# Altium PCB RMC Backplane PCB.PcbDoc
Units mm, origin at the board's own origin, x right, y up, seen from the top; angles counter-clockwise.
Board outline 152.33 x 103.42 mm, 2 copper layers (Top Layer, Bottom Layer); 44 components, 61 nets, 266 pads, 39 vias.
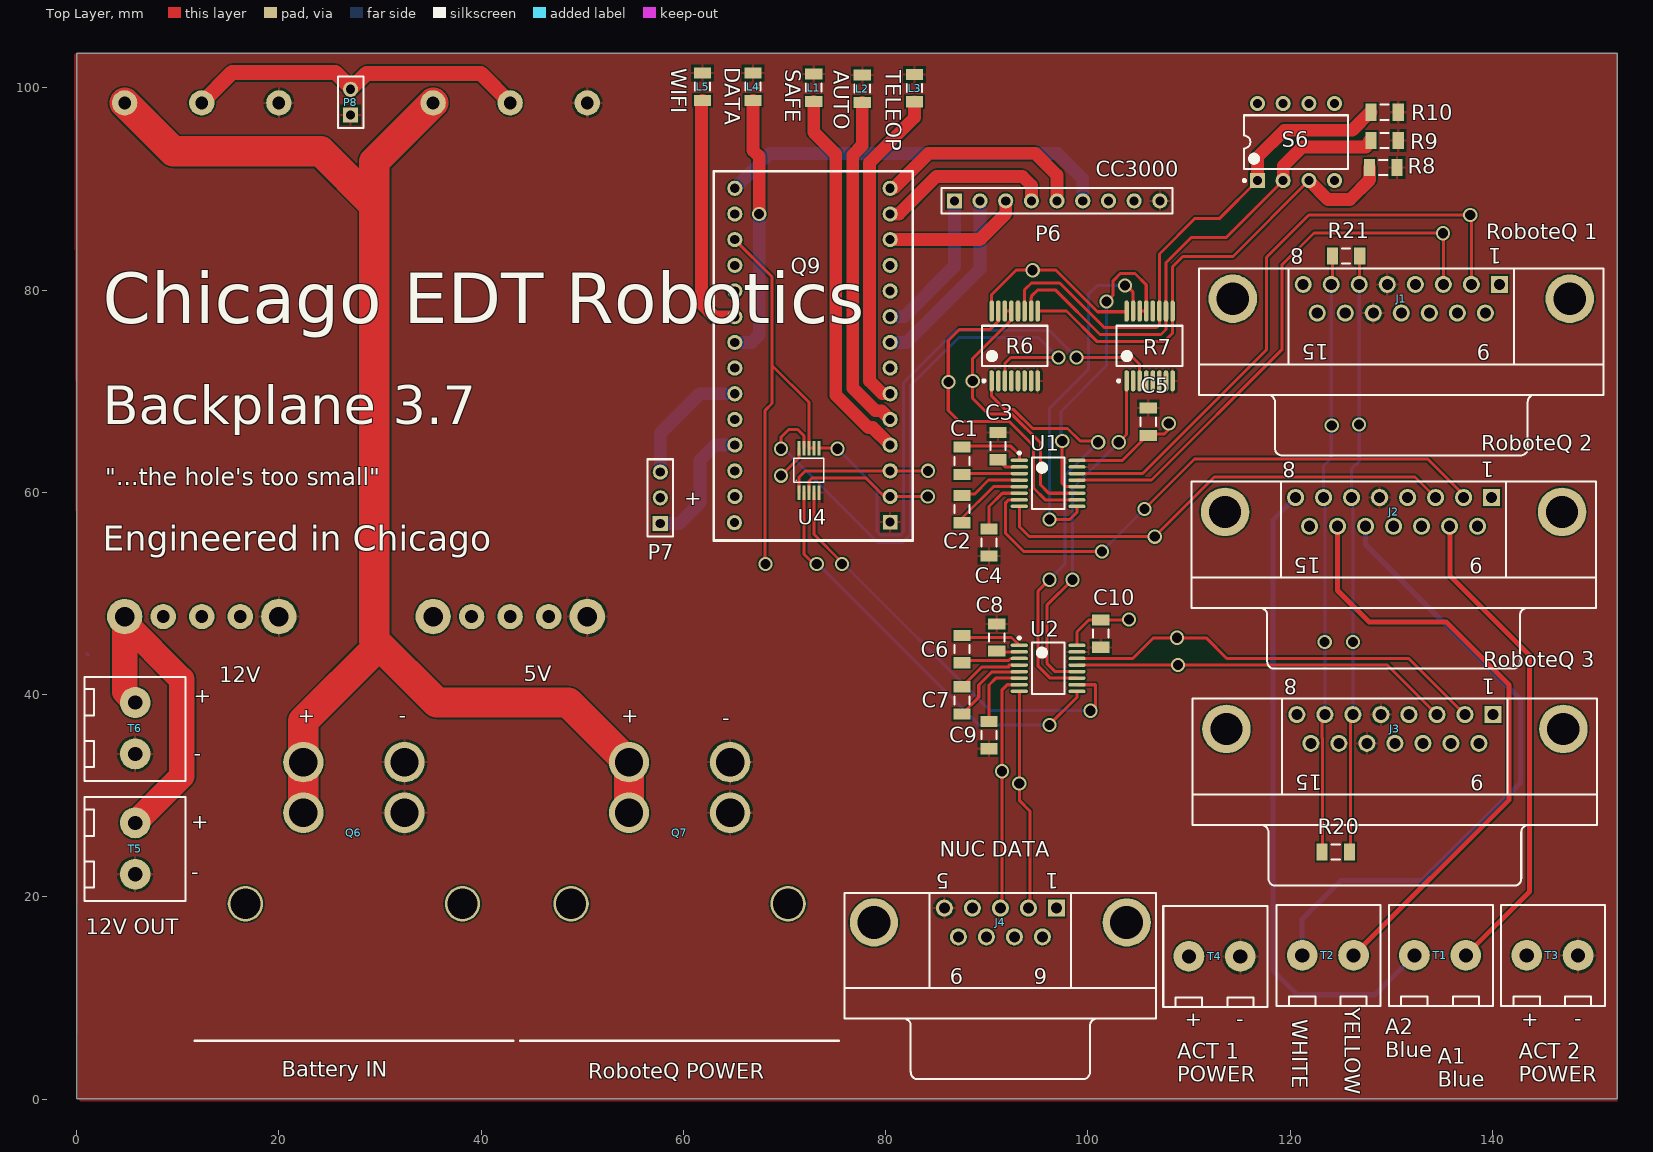
[diagram p0: Top Layer view]
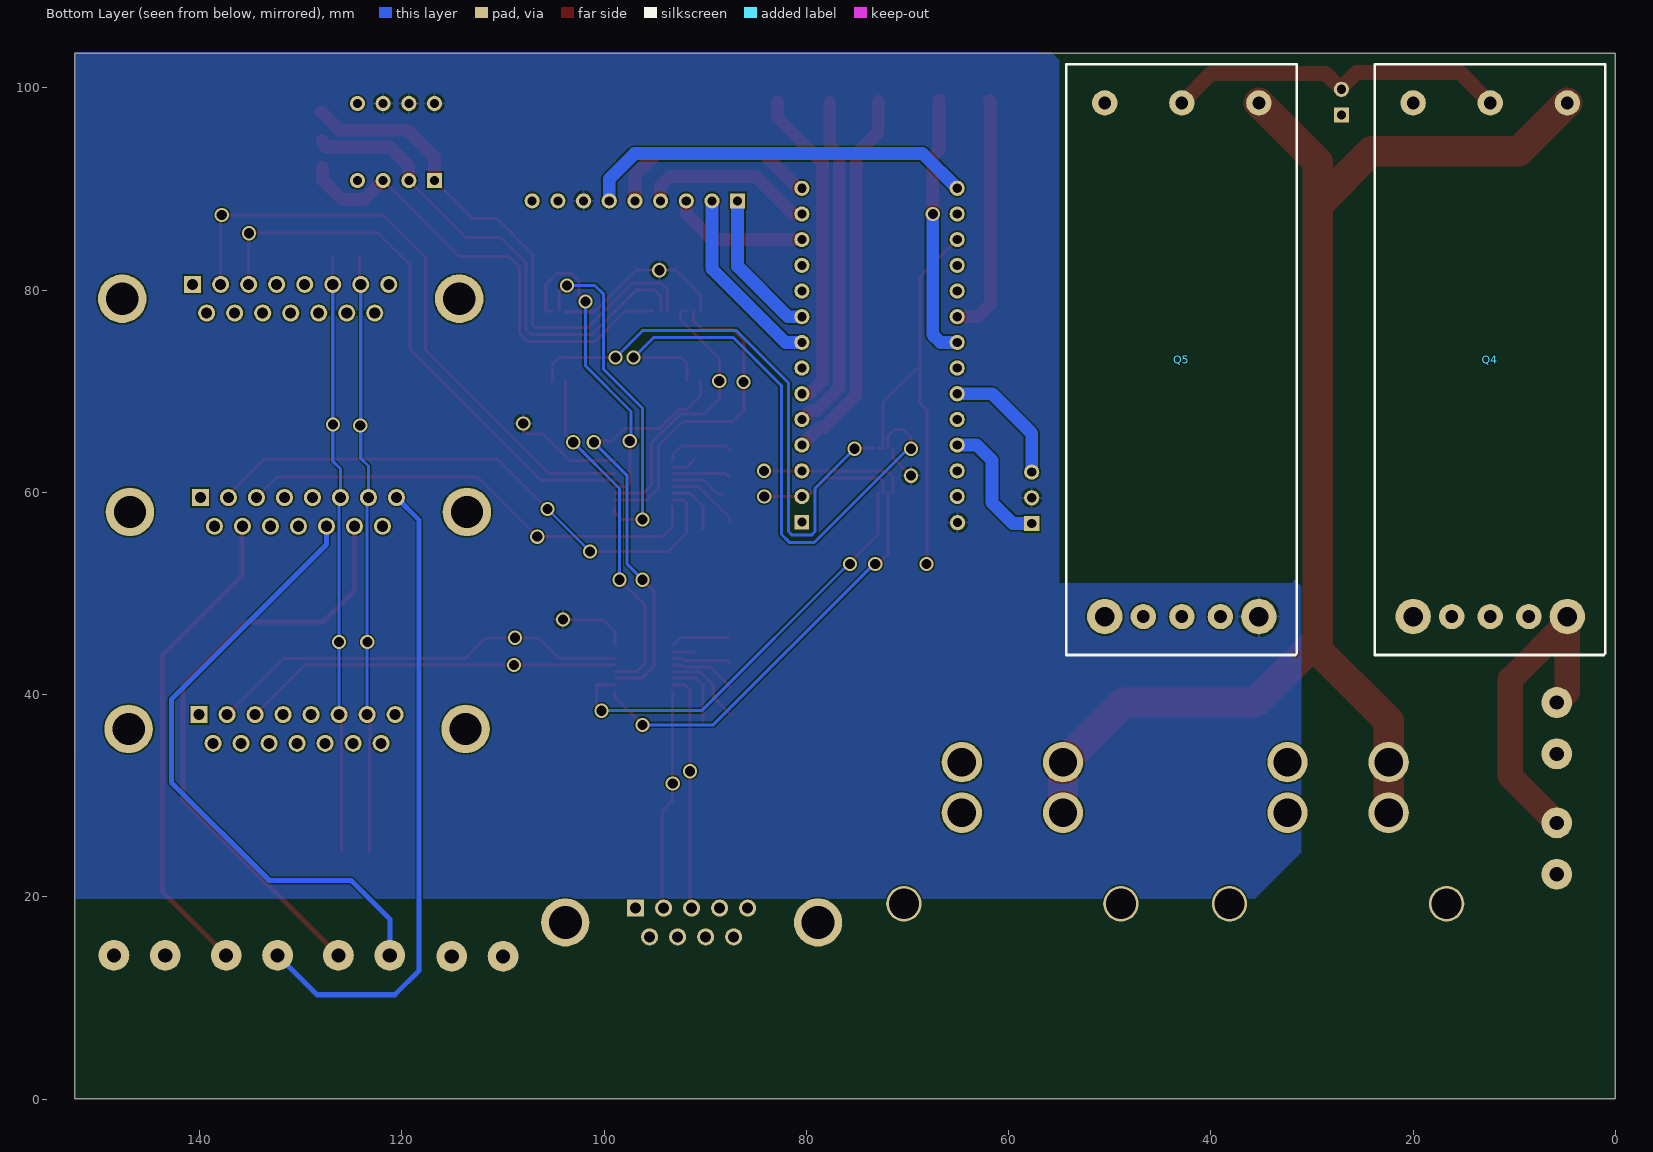
[diagram p1: Bottom Layer view, seen from below]

## Layer stack, top to bottom
Top Solder: solder mask 0.0102, Solder Resist, Dk 3.5
Top Layer: signal copper 0.0356
Dielectric 1: dielectric 0.32, FR-4, Dk 4.8
Bottom Layer: signal copper 0.0356
Bottom Solder: solder mask 0.0102, Solder Resist, Dk 3.5

## Board outline
0,0.025 152.333,0.025 152.333,103.44 0,103.44

## Design rules (kind name [scope] priority, off if disabled: settings)
Clearance [All] p1: gap=0.15
PolygonConnect [All] p1: connectstyle=Relief reliefconductorwidth=0.254 reliefentries=4 polygonreliefangle="90 Angle" airgapwidth=0.254
RoutingVias [All] p1: holewidth=0.711 width=1.27 viastyle="Through Hole" minholewidth=0.711 minwidth=1.27 maxholewidth=0.711 maxwidth=1.27
SolderMaskExpansion [All] p1: expansion=0.102
Width [All] p1: maxlimit=10 minlimit=0.254 preferedwidth=0.254
30 further rules are at their usual default settings.

## Components (designator, comment, footprint, x,y, rotation, side; value= is the part's Value field where it differs from the comment)
C1 "Cap Semi" C1206 87.563,63.125 r270 top
C2 "Cap Semi" C1206 87.563,58.355 r270 top
C3 "Cap Semi" C1206 91.119,64.578 r270 top
C4 "Cap Semi" C1206 90.23,55.053 r270 top
C5 "Cap Semi" C1206 105.978,66.991 r90 top
C6 "Cap Semi" C1206 87.563,44.512 r270 top
C7 "Cap Semi" C1206 87.563,39.432 r270 top
C8 "Cap Semi" C1206 90.992,45.655 r270 top
C9 "Cap Semi" C1206 90.23,36.003 r270 top
C10 "Cap Semi" C1206 101.279,46.036 r270 top
J1 "D Connector 15" DSUB1.385-2H15 130.997,69.658 r180 top
J2 "D Connector 15" DSUB1.385-2H15 130.235,48.576 r180 top
J3 "D Connector 15" DSUB1.385-2H15 130.362,27.113 r180 top
J4 "D Connector 9" DSUB1.385-2H9 91.35,7.975 r180 top
L1 "Cap Semi" C1206 72.9,100.025 r270 top
L2 "Cap Semi" C1206 77.7,99.925 r270 top
L3 "Cap Semi" C1206 82.87,99.984 r270 top
L4 "Cap Semi" C1206 66.9,100.125 r270 top
L5 "Cap Semi" C1206 61.9,100.125 r270 top
P6 "Header 9" HDR1X9 86.801,88.835 r0 top
P7 "Header 3" HDR1X3 57.724,56.931 r90 top
P8 "Header 2" HDR1X2 27.1,97.325 r90 top
Q4 "DC/DC" EHHD 23.8,98.525 r270 bottom
Q5 "DC/DC" EHHD 54.3,98.525 r270 bottom
Q6 "Power Conn" "Mini-Fit Power Conn" 16.7,19.325 r0 top
Q7 "Power Conn" "Mini-Fit Power Conn" 48.9,19.325 r0 top
Q9 "TeensyLC" TeensyLC 80.457,57.058 r180 top
R6 "Res Pack4" SSOP16_N 92.77,74.484 r90 top
R7 "Res Pack4" SSOP16_N 106.105,74.484 r90 top
R8 "Cap Semi" C1206 129.219,92.137 r180 top
R9 "Cap Semi" C1206 129.346,94.804 r180 top
R10 "Cap Semi" C1206 129.346,97.598 r0 top
R20 "Cap Semi" C1206 124.52,24.446 r0 top
R21 "Cap Semi" C1206 125.536,83.374 r0 top
S6 "SW-DIP4" DIP-8 120.589,94.65 r90 top
T1 "282857-2" 282857-2 132.3,14.225 r270 top
T2 "282857-2" 282857-2 121.2,14.225 r270 top
T3 "282857-2" 282857-2 143.4,14.225 r270 top
T4 "282857-2" 282857-2 110,14.125 r270 top
T5 "282857-2" 282857-2 5.8,27.325 r180 top
T6 "282857-2" 282857-2 5.8,39.225 r180 top
U1 "MAX202IPW" TI-PW16_N 96.072,60.895 r0 top
U2 "MAX202IPW" TI-PW16_N 96.072,42.607 r0 top
U4 "Mux/Demux" TS3A24157 71.44,59.979 r90 top

## Footprints (in the part's own frame and the unit in brackets; to place one, negate y for a bottom-side part, rotate by r counter-clockwise, add the part's x,y. Pads: shape width x height; smd on the part's side, far side on the other; paste and mask are expansions set on the pad)
282857-2 [mil] "TE CONNECTIVITY / BUCHANAN  282857-2  Wire-To-Board Terminal Block, 2, 300 V, 24 A, 30 AWG, 12 AWG, 3 mm²"
  round 120 hole 55: 1(0,0) 2(0,200)
  silkscreen extent -196,-100 198,305, body extent -196,-100 198,320, height 752
C1206 [mm] "Chip Capacitor, Body 3.2x1.6mm, IPC High Density"
  rect 1.1x1.7 smd: 1(-1.35,0) 2(1.35,0)
  silkscreen extent -0.4,-0.75 0.4,0.75, body extent -1.7,-0.9 1.7,0.9, height 1.3
DIP-8 [mm] "DIP; 8 Leads; Row Spacing 7.62 mm; Pitch 2.54 mm"
  rect 1.5x1.5 hole 0.9: 1(-3.81,3.81)
  round 1.5 hole 0.9: 2(-3.81,1.27) 3(-3.81,-1.27) 4(-3.81,-3.81) 5(3.81,-3.81) 6(3.81,-1.27) 7(3.81,1.27) 8(3.81,3.81)
  silkscreen extent -3.93,-5.15 2.65,5.23, body extent -3.6,-5.15 3.6,5.15, height 5.08
DSUB1.385-2H9 [mm] "Connector; D Subminiature; 9 Position; Right Angle; Pitch 1.385 mm"
  rect 1.69x1.69 hole 1.09: 1(-5.54,-10.92)
  round 1.69 hole 1.09: 2(-2.77,-10.92) 3(0,-10.92) 4(2.77,-10.92) 5(5.54,-10.92) 6(-4.155,-8.08) 7(-1.385,-8.08) 8(1.385,-8.08) 9(4.155,-8.08)
  round 4.76 hole 3.26: 10(-12.495,-9.5) 11(12.495,-9.5)
  silkscreen extent -15.4,-12.4 15.4,6
DSUB1.385-2H15 [mm] "Connector; D Subminiature; 15 Position; Right Angle; Pitch 1.385 mm"
  rect 1.69x1.69 hole 1.09: 1(-9.695,-10.92)
  round 1.69 hole 1.09: 2(-6.925,-10.92) 3(-4.155,-10.92) 4(-1.385,-10.92) 5(1.385,-10.92) 6(4.155,-10.92) 7(6.925,-10.92) 8(9.695,-10.92) 9(-8.31,-8.08) 10(-5.54,-8.08) 11(-2.77,-8.08) 12(0,-8.08) 13(2.77,-8.08) 14(5.54,-8.08) 15(8.31,-8.08)
  round 4.8 hole 3.18: 16(-16.66,-9.5) 17(16.66,-9.5)
  silkscreen extent -20,-12.5 20,6
EHHD [mm] "DC/DC"
  round 2.5 hole 1.27: 1(0,19.04) 2(0,11.42) 3(0,3.8) 5(50.8,7.61) 6(50.8,11.42) 7(50.8,15.23)
  round 3.5 hole 1.93: 4(50.8,3.8) 8(50.8,19.04)
  Top Layer lines w0.254: 54.44,22.8 54.6,22.64
  silkscreen extent -3.8,0 54.6,22.8
HDR1X2 [mm] "Connector; Header; 2 Position"
  rect 1.5x1.5 hole 0.9: 1(0,0)
  round 1.5 hole 0.9: 2(2.54,0)
  silkscreen extent -1.27,-1.27 3.81,1.27
HDR1X3 [mm] "Connector; Header; 3 Position"
  rect 1.5x1.5 hole 0.9: 1(0,0)
  round 1.5 hole 0.9: 2(2.54,0) 3(5.08,0)
  silkscreen extent -1.27,-1.27 6.35,1.27
HDR1X9 [mm] "Connector; Header; 9 Position"
  rect 1.5x1.5 hole 0.9: 1(0,0)
  round 1.5 hole 0.9: 2(2.54,0) 3(5.08,0) 4(7.62,0) 5(10.16,0) 6(12.7,0) 7(15.24,0) 8(17.78,0) 9(20.32,0)
  silkscreen extent -1.27,-1.27 21.59,1.27
"Mini-Fit Power Conn" [mm] "Molex Mini-Fit Power Connector"
  round 3.5 hole 3: 0(0,0) 0(21.46,0)
  round 4 hole 2.8: 1(5.73,9) 1(5.73,14) 2(15.73,9) 2(15.73,14)
  silkscreen extent -5,-13.56 26.46,-13.56
SSOP16_N [mm] "SOP, 16-Leads, Body 6.2x5.3mm, Pitch 0.65mm, IPC Medium Density"
  oval 2.1x0.45 smd: 1(-3.45,2.275) 2(-3.45,1.625) 3(-3.45,0.975) 4(-3.45,0.325) 5(-3.45,-0.325) 6(-3.45,-0.975) 7(-3.45,-1.625) 8(-3.45,-2.275) 9(3.45,-2.275) 10(3.45,-1.625) 11(3.45,-0.975) 12(3.45,-0.325) 13(3.45,0.325) 14(3.45,0.975) 15(3.45,1.625) 16(3.45,2.275)
  silkscreen extent -3.57,-3.25 2,3.25, body extent -2.7,-3.25 2.7,3.25, height 2
TeensyLC [mm] "Teensy LC Footprint"
  rect 1.45x1.45 hole 0.9: 1(0,0)
  round 1.5 hole 0.9: 2(0,-2.54) 3(0,-5.08) 4(0,-7.62) 5(0,-10.16) 6(0,-12.7) 7(0,-15.24) 8(0,-17.78) 9(0,-20.32) 10(0,-22.86) 11(0,-25.4) 12(0,-27.94) 13(0,-30.48) 14(0,-33.02) 15(15.367,-33.02) 16(15.367,-30.48) 17(15.367,-27.94) 18(15.367,-25.4) 19(15.367,-22.86) 20(15.367,-20.32) 21(15.367,-17.78) 22(15.367,-15.24) 23(15.367,-12.7) 24(15.367,-10.16) 25(15.367,-7.62) 26(15.367,-5.08) 27(15.367,-2.54) 28(15.41,0.05)
  silkscreen extent -2.24,-34.7 17.43,1.82
TI-PW16_N [mm] "TSOP, 16-Leads, Body 5x4.4mm, Pitch 0.65mm, IPC Medium Density"
  oval 1.7x0.35 smd: 1(-2.85,2.275) 2(-2.85,1.625) 3(-2.85,0.975) 4(-2.85,0.325) 5(-2.85,-0.325) 6(-2.85,-0.975) 7(-2.85,-1.625) 8(-2.85,-2.275) 9(2.85,-2.275) 10(2.85,-1.625) 11(2.85,-0.975) 12(2.85,-0.325) 13(2.85,0.325) 14(2.85,0.975) 15(2.85,1.625) 16(2.85,2.275)
  silkscreen extent -2.97,-2.55 1.6,3.12, body extent -2.25,-2.55 2.25,2.55, height 1.2
TS3A24157 [mm] "TS3A24157 Mux/Demux SMD"
  rect 1.45x0.3 smd: 1(0,0) 2(0,-0.5) 3(0,-1) 4(0,-1.5) 5(0,-2) 6(4.4,-2) 7(4.4,-1.5) 8(4.4,-1) 9(4.4,-0.5) 10(4.4,0)
  silkscreen extent 1.03,-2.44 3.39,0.53

## Part data
C1 C2 C3 C4 C5 C6 C7 C8 C9 C10 L1 L2 L3 L4 L5 R8 R9 R10 R20 R21: "Capacitor (Semiconductor SIM Model)"
J1 J2 J3: "Receptacle Assembly, 15 Position, Right Angle"
J4: "Receptacle Assembly, 9 Position, Right Angle"
P6: "Header, 9-Pin"
P7: "Header, 3-Pin"
P8: "Header, 2-Pin"
Q4 Q5: library part EHHD, "Voltage Regulator"
Q6 Q7: library part "Mini-Fit Power Conn", "Mini-Fit Molex Connector"
R6 R7: "Isolated Resistor Network"
S6: "DIP Switch"
U1 U2: "5-V Dual RS-232 Line Driver / Receiver with ±15-kV ESD Protection, -40 to 85 degC, 16-Pin TSSOP (PW), Green (RoHS & no Sb/Br)"

## Via types
v1: diameter 1.4, hole 1, Top Layer to Bottom Layer, 39 vias

## Nets (pads, with @x,y where several pads share a name; then routed paths per layer and width w, separated by ;. In a path a pad name is that pad's centre, name@x,y a point inside that pad or via, vN(x,y) a via of type N, cw(c..) or ccw(c..) an arc to the next point about the centre after c; other vN are vias at no path point)
3V3: P6.8
CAN-H: J1.7 J2.7 J3.7 R20.1 R21.1 | length 59.5
  Top Layer w0.3: R20.1 123.197,24.473 123.197,35.694 123.17,35.721 123.17,37.766 J3.7 ; J1.7 124.186,80.692 R21.1
  Bottom Layer w0.3: J3.7 123.437,59.369 J2.7 123.31,62.606 124.072,63.368 J1.7
  other v1: 123.422,45.225 124.122,66.625
CAN-L: J1.6 J2.6 J3.6 R20.2 R21.2 | length 59.5
  Top Layer w0.3: R20.2 125.967,24.543 125.967,37.793 J3.6 ; J1.6 126.886,80.622 R21.2
  Bottom Layer w0.3: J3.6 126.207,59.369 J2.6 126.08,62.328 126.842,63.09 J1.6
  other v1: 126.222,45.225 126.822,66.725
CLK: P6.6 Q9.15 | length 39
  Bottom Layer w1.27: Q9.15 68.519,93.507 96.988,93.507 99.501,90.994 P6.6
"CONTROL LINE": Q9.17 U4.7 U4.8 | length 44.3
  Top Layer w0.3: Q9.17 68.773,81.315 68.773,72.552 ; v1@68.1,52.725 68.1,68.125 68.773,68.798 68.773,72.552 ; U4.7 U4.8 72.44,68.885 68.773,72.552
  other v1: 68.122,52.925
CS: P6.3 Q9.12 | length 13.8
  Top Layer w1.27: Q9.12 89.314,84.998 91.881,87.565 P6.3
GROUND: C3.1 C4.2 C5.2 C8.1 C9.2 C10.2 J1.5 J1.13 J2.5 J3.5 J3.13 J4.5 L1.1 L2.1 L3.1 L4.1 L5.1 P6.9 P8.1 Q4.3 Q4.4 Q5.3 Q5.4 Q6.2 Q7.2 Q9.1 R6.8 R7.8 R8.1 R9.1 R10.2 T3.2 T4.2 T5.2 T6.2 U1.15 U2.15 U4.5
IRQ: P6.1 Q9.9 | length 14.9
  Bottom Layer w1.27: Q9.9 81.821,77.378 86.801,82.358 P6.1
"LED AUTO": L2.2 Q9.5 | length 33.6
  Top Layer w1.27: L2.2 77.7,94.325 76.749,93.374 76.749,70.334 79.001,68.082 79.593,68.082 Q9.5
"LED DATA": L4.2 Q9.21 | length 26.2
  Top Layer w1.27: L4.2 66.9,93.825 67.503,93.222 v1(67.503,87.538)
  Bottom Layer w1.27: Q9.21 66.741,74.838 67.503,75.6 v1(67.503,87.538)
"LED SAFE": L1.2 Q9.4 | length 37.4
  Top Layer w1.27: L1.2 72.9,95.625 75.072,93.453 75.072,69.639 78.306,66.405 78.73,66.405 Q9.4
"LED TELEOP": L3.2 Q9.6 | length 32
  Top Layer w1.27: Q9.6 79.695,69.758 78.425,71.028 78.425,92.618 82.87,97.063 L3.2
"LED WIFI": L5.2 Q9.20 | length 24
  Top Layer w1.27: L5.2 61.788,98.663 61.788,78.648 63.058,77.378 Q9.20
MISO: P6.5 Q9.14 | length 21.4
  Top Layer w1.27: Q9.14 80.805,90.078 84.261,93.534 94.802,93.534 96.961,91.375 P6.5
MOSI: P6.4 Q9.13 | length 17.4
  Top Layer w1.27: Q9.13 81.313,87.538 85.023,91.248 93.532,91.248 94.421,90.359 P6.4
NetC1_1: C1.1 U1.1 | length 6.8
  Top Layer w0.3: C1.1@87.563,64.15 87.991,64.578 92.389,64.578 93.222,63.745 U1.1
NetC1_2: C1.2 U1.3 | length 5.8
  Top Layer w0.3: C1.2@87.563,61.45 87.983,61.87 U1.3
NetC2_1: C2.1 U1.4 | length 5.5
  Top Layer w0.3: C2.1@88.325,59.832 88.786,59.832 90.174,61.22 U1.4
NetC2_2: C2.2 U1.5 | length 7.4
  Top Layer w0.3: C2.2 87.563,57.466 90.667,60.57 U1.5
NetC3_2: C3.2 U1.2 | length 2.4
  Top Layer w0.3: C3.2 91.827,62.52 U1.2
NetC4_1: C4.1 U1.6 | length 5.7
  Top Layer w0.3: C4.1 90.23,58.609 91.541,59.92 U1.6
NetC6_1: C6.1 U2.1 | length 5.9
  Top Layer w0.3: C6.1@87.69,45.655 92.449,45.655 U2.1
NetC6_2: C6.2 U2.3 | length 5.8
  Top Layer w0.3: C6.2 87.783,43.382 92.148,43.382 92.348,43.582 U2.3
NetC7_1: C7.1 U2.4 | length 6.7
  Top Layer w0.3: C7.1 89.522,42.741 92.2,42.741 92.2,42.932 U2.4
NetC7_2: C7.2 U2.5 | length 8.1
  Top Layer w0.3: C7.2 89.214,39.733 89.214,40.956 90.52,42.262 93.222,42.262 U2.5
NetC8_2: C8.2 U2.2 | length 2.3
  Top Layer w0.3: C8.2 91.065,44.232 U2.2
NetC9_1: C9.1 U2.6 | length 6.9
  Top Layer w0.3: C9.1 90.23,40.956 90.906,41.632 U2.6
NetJ2_8: J2.8 T1.1 | length 64.3
  Bottom Layer w0.5: J2.8 118.3,57.256 118.3,12.725 120.7,10.325 128.4,10.325 T1.1
NetJ2_10: J2.10 T1.2 | length 48.3
  Top Layer w0.5: J2.10 135.823,56.608 135.823,51.751 143.697,43.877 143.697,20.542 T1.2
NetJ2_13: J2.13 T2.1 | length 62.5
  Bottom Layer w0.5: T2.1 121.2,17.825 125,21.625 133.1,21.625 142.8,31.325 142.8,39.525 127.465,54.86 J2.13
NetJ2_14: J2.14 T2.2 | length 60.3
  Top Layer w0.5: J2.14 124.695,50.306 127.822,47.179 135.442,47.179 141.665,40.956 141.665,29.61 T2.2
NetJ4_2: J4.2 U2.8 | length 21.9
  Top Layer w0.254: J4.2 J4.2@94.27,19.045
  Top Layer w0.3: U2.8 93.222,29.556 94.27,28.508 J4.2@94.27,19.045
  other v1: 93.222,31.225
NetJ4_3: J4.3 U2.7 | length 23.6
  Top Layer w0.254: J4.3 J4.3@91.5,19.045
  Top Layer w0.3: J4.3@91.5,19.045 91.5,28.508 91.5,40.448 92.034,40.982 U2.7
  other v1: 91.522,32.425
NetP7_1: P7.1 Q9.25 | length 13.2
  Top Layer w1.27: P7.1 P7.1@57.851,57.058
  Bottom Layer w1.27: P7.1 59.596,56.931 61.655,58.99 61.655,63.181 63.152,64.678 Q9.25
NetP7_3: P7.3 Q9.23 | length 12.8
  Bottom Layer w1.27: P7.3 57.724,65.854 61.628,69.758 Q9.23
NetP8_2: P8.2 Q4.2 Q5.2 | length 34.4
  Top Layer w1.5: Q4.2 15.38,101.525 25.6,101.525 27.1,100.025 P8.2 28.66,101.425 39.98,101.425 Q5.2
NetQ4_1: Q4.1 Q5.1 Q6.1 Q7.1 | length 139.3
  Top Layer w3: Q4.1 9.56,93.725 24.14,93.725 29.44,88.425 ; Q6.1@22.43,28.325 22.43,33.325 22.43,37.395 29.93,44.895 ; Q5.1 29.44,92.705 29.44,88.425 ; Q7.1@54.63,28.225 54.63,33.225 48.63,39.225 35.6,39.225 29.44,45.385 29.44,88.425
NetQ4_8: Q4.8 T5.1 T6.1 | length 33
  Top Layer w2.5: Q4.8 Q4.8@4.76,47.165 ; T5.1 10.4,31.925 10.4,41.525 Q4.8@4.76,47.165 ; T6.1 4.76,40.265 Q4.8@4.76,47.165
NetR6_1: R6.1 U2.11 | length 43
  Top Layer w0.3: R6.1 90.495,69.52 91.824,68.191 92.678,68.191 94.544,66.325 98,66.325 99.239,65.086 101.025,65.086 v1(101.025,64.959) ; v1(96.199,51.37) 95.056,50.227 95.056,42.861 96.285,41.632 U2.11
  Bottom Layer w0.3: v1(96.199,51.37) 97.723,52.894 97.723,61.657 v1(101.025,64.959)
NetR6_3: R6.3 U4.9 | length 61.6
  Top Layer w0.3: v1(69.656,64.324) 69.656,65.467 70.418,66.229 71.307,66.229 71.94,65.596 U4.9 ; R6.3 91.795,72.747 92.389,73.341 v1(97.088,73.341)
  Bottom Layer w0.3: v1(69.656,64.324) 69.955,64.324 79.209,55.07 81.705,55.07 82.47,55.835 82.47,70.551 87.221,75.302 95.127,75.302 v1(97.088,73.341)
NetR6_9: R6.9 R7.9 R8.2 S6.3 | length 47.2
  Top Layer w0.3: R6.9@95.176,77.934 97.902,77.934 100.921,74.915 107.552,74.915 108.38,75.743 R7.9 108.38,82.314 109.396,83.33 114.349,83.33 S6.3
  Top Layer w1.27: S6.3 123.737,88.962 125.917,88.962 127.869,90.914 R8.2
NetR6_10: R6.10 R7.10 R9.2 S6.2 | length 49.8
  Top Layer w0.3: R6.10 94.395,79.214 94.451,79.27 94.451,79.437 95.015,80.001 96.834,80.001 101.213,75.621 107.242,75.621 107.73,76.109 R7.10 107.73,82.713 110.237,85.22 113.699,85.22 S6.2
  Top Layer w1.27: S6.2 119.319,92.27 121.193,94.144 127.494,94.144 R9.2@127.875,94.804
NetR6_11: R6.11 R7.11 R10.1 S6.1 | length 52.7
  Top Layer w0.3: R6.11 93.745,79.437 93.745,80.031 94.421,80.707 97.215,80.707 101.594,76.328 106.806,76.328 107.08,76.602 R7.11 107.08,83.587 110.603,87.11 113.049,87.11 S6.1
  Top Layer w1.27: S6.1 116.779,93.159 119.44,95.82 126.139,95.82 127.917,97.598 R10.1
NetR6_13: R6.13 R6.14 U1.11 | length 27.5
  Top Layer w0.3: 88.59,73.225 92.445,77.08 R6.13 R6.14 ; 88.6,73.215 88.6,69.325 90.184,67.741 92.492,67.741 95.335,64.898 95.335,60.726 96.141,59.92 U1.11
  other v1: 88.622,71.025
NetR6_15: R6.15 U1.10 | length 32.5
  Top Layer w0.3: R6.15 91.145,76.923 90.357,76.135 87.309,76.135 86.2,75.026 86.2,68.1 87.266,67.034 92.199,67.034 94.628,64.605 94.628,60.434 95.792,59.27 U1.10
  other v1: 86.222,70.925
NetR7_1: R7.1 U2.12 | length 34.5
  Top Layer w0.3: v1(98.485,51.37) 95.945,48.83 95.945,43.115 96.778,42.282 U2.12 ; v1(103.057,64.959) 103.83,65.732 R7.1
  Bottom Layer w0.3: v1(98.485,51.37) 98.485,60.387 v1(103.057,64.959)
NetR7_3: R7.3 U4.6 | length 57.8
  Top Layer w0.3: U4.6 75.189,64.379 v1(75.244,64.324) ; v1(98.866,73.341) 104.2,73.341 104.327,73.468 105.089,72.706 ; R7.3 105.13,72.665
  Bottom Layer w0.3: v1(75.244,64.324) 79.151,60.417 79.151,56.128 79.502,55.777 81.412,55.777 81.763,56.128 81.763,70.843 86.928,76.008 96.199,76.008 v1(98.866,73.341)
NetR7_13: R7.13 R7.14 U1.12 | length 31.1
  Top Layer w0.3: v1(97.469,65.086) 97.469,60.895 97.794,60.57 U1.12 ; v1(101.852,78.867) 102.501,79.516 102.501,80.946 103.199,81.644 104.66,81.644 105.78,80.524 R7.13 R7.14
  Bottom Layer w0.3: v1(97.469,65.086) 97.342,65.213 97.342,68.007 101.852,72.517 v1(101.852,78.867)
NetR7_15: R7.15 U1.9 | length 34.4
  Top Layer w0.3: v1(96.199,57.339) 98.231,57.339 98.922,58.03 U1.9 ; v1(103.692,80.453) 103.819,80.453 104.48,79.792 R7.15
  Bottom Layer w0.3: v1(96.199,57.339) 96.199,68.292 100.057,72.15 100.057,79.612 100.898,80.453 v1(103.692,80.453)
"RX 1": J1.3 U1.13 | length 56.3
  Top Layer w0.3: U1.13 106.303,61.22 119.186,74.103 119.186,82.485 122.361,85.66 135.152,85.66 J1.3
  other v1: 135.122,85.625
"RX 2": J2.3 U1.8 | length 46.9
  Top Layer w0.3: U1.8 93.222,56.633 94.23,55.625 106.6,55.625 112.505,61.53 132.356,61.53 J2.3
  other v1: 106.622,55.625
"RX 3": J3.3 U2.13 | length 37.6
  Top Layer w0.3: U2.13 129.618,42.932 J3.3
  other v1: 108.922,42.925
"RX NUC": U2.10 U4.4 | length 43.4
  Top Layer w0.3: U4.4 72.94,55.833 75.7,53.073 v1(75.7,52.925) ; U2.10 100.745,40.982 100.745,38.771 100.39,38.416 v1(100.263,38.416)
  Bottom Layer w0.3: v1(75.7,52.925) 75.848,52.925 90.357,38.416 v1(100.263,38.416)
"RX TEENSY": Q9.2 U4.3 | length 13.8
  Top Layer w0.3: U4.3 72.44,61.141 72.731,61.432 78.044,61.432 79.878,59.598 Q9.2 v1(84.173,59.598)
"TX 1": J1.2 U1.14 | length 61.8
  Top Layer w0.3: U1.14 105.429,61.87 117.662,74.103 117.662,83.247 121.853,87.438 137.922,87.438 J1.2
  other v1: 137.822,87.425
"TX 2": J2.2 U1.7 | length 56
  Top Layer w0.3: U1.7 92.161,59.27 91.881,58.99 91.881,55.942 93.659,54.164 v1(101.406,54.164) ; v1(105.597,58.355) 110.55,63.308 133.617,63.308 137.16,59.765 J2.2
  Bottom Layer w0.3: v1(101.406,54.164) v1(105.597,58.355)
"TX 3": J3.2 U2.14 | length 42.4
  Top Layer w0.3: U2.14 104.457,43.582 106.5,45.625 111.7,45.625 113.743,43.582 131.738,43.582 J3.2
  other v1: 108.822,45.625
"TX NUC": U2.9 U4.2 | length 41.9
  Top Layer w0.3: U4.2 71.94,53.885 72.9,52.925 v1(73.2,52.925) ; v1(96.199,37.019) 98.922,39.742 U2.9
  Bottom Layer w0.3: v1(73.2,52.925) 73.2,53.033 89.214,37.019 v1(96.199,37.019)
"TX TEENSY": Q9.3 U4.1 | length 14.5
  Top Layer w0.3: U4.1 71.44,61.503 72.075,62.138 Q9.3 v1(84.187,62.138)
VBAT: C5.1 C10.1 P6.7 P7.2 Q5.8 Q9.28 R6.16 R7.16 S6.6 S6.7 S6.8 U1.16 U2.16 U4.10 | length 39.1
  Top Layer w0.3: v1(69.656,61.657) 71.44,63.441 U4.10 ; R6.16 90.495,79.575 92.897,81.977 v1(94.548,81.977) 96.848,81.977 100.958,77.867 103.83,77.867 R7.16 ; U2.16 98.922,46.219 100.089,47.386 C10.1 104.026,47.386 v1(104.073,47.433) ; U1.16 103.427,63.17 106.058,65.801 107.582,65.801 108,66.219 v1(108,66.825)
VBEN: P6.2 Q9.8 | length 18.6
  Bottom Layer w1.27: Q9.8 82.075,74.838 89.341,82.104 P6.2
pads on no net: J1.1 J1.4 J1.8 J1.9 J1.10 J1.11 J1.12 J1.14 J1.15 J1.16 J1.17 J2.1 J2.4 J2.9 J2.11 J2.12 J2.15 J2.16 J2.17 J3.1 J3.4 J3.8 J3.9 J3.10 J3.11 J3.12 J3.14 J3.15 J3.16 J3.17 J4.1 J4.4 J4.6 J4.7 J4.8 J4.9 J4.10 J4.11 Q4.5 Q4.6 Q4.7 Q5.5 Q5.6 Q5.7 Q6.0 Q7.0 Q9.7 Q9.10 Q9.11 Q9.16 Q9.18 Q9.19 Q9.22 Q9.24 Q9.26 Q9.27 R6.2 R6.4 R6.5 R6.6 R6.7 R6.12 R7.2 R7.4 R7.5 R7.6 R7.7 R7.12 S6.4 S6.5 T3.1 T4.1

## Polygon pours and split planes (outlines as drawn)
VBAT on Bottom Layer "Bottom Layer-Vcc" (solid, remove dead copper, pour order 30): 152.4,103.525 55.8,103.525 55.475,103.2 55,102.725 55,51.025 32.025,51.025 31.7,51.35 31.05,50.7 31.05,44.075 31.05,24.425 35.675,19.8 152.25,19.8
GROUND on Top Layer "Top Layer-GND" (solid, remove dead copper, pour order 22): -0.225,103.4 152.5,103.4 152.625,103.525 152.375,103.275 152.375,-0.225 0.4,-0.225 0.15,0.025

## Silkscreen, mask and mechanical layers (free items; w line width, h text height)
Top Overlay:
  text "DATA" at 64.1,102.025 h1.52 r270
  text "WIFI" at 58.8,101.925 h1.52 r270
  text "SAFE" at 70.1,101.825 h1.52 r270
  text "AUTO" at 74.9,101.725 h1.52 r270
  text "TELEOP" at 80,101.725 h1.52 r270
  text "CC3000" at 100.8,91.225 h1.52
  text "RoboteQ 1" at 139.4,85.025 h1.52
  text "Chicago EDT Robotics" at 2.6,76.725 h5
  text "Backplane 3.7" at 2.6,66.725 h3.8
  text "RoboteQ 2" at 138.9,64.125 h1.52
  text "\"...the hole's too small\"" at 2.85,60.725 h1.7
  text "+" at 60.1,58.725 h1.52
  text "Engineered in Chicago" at 2.6,54.225 h2.5
  text "RoboteQ 3" at 139.1,42.725 h1.52
  text "5V" at 44.2,41.325 h1.52
  text "12V" at 14.1,41.225 h1.52
  text "+" at 11.6,39.225 h1.52
  text "+" at 21.85,37.225 h1.52
  text "-" at 31.85,37.225 h1.52
  text "+" at 53.85,37.225 h1.52
  text "-" at 63.85,36.975 h1.52
  text "-" at 11.6,33.475 h1.52
  text "+" at 11.35,26.725 h1.52
  text "NUC DATA" at 85.35,23.975 h1.52
  text "-" at 11.35,21.725 h1.52
  text "12V OUT" at 0.9,16.325 h1.52
  text "YELLOW" at 125.4,9.025 h1.52 r270
  text "WHITE" at 120.2,7.925 h1.52 r270
  text "-" at 148.125,7.25 h1.52
  text "+" at 109.6,7.225 h1.52
  text "+" at 142.85,7.225 h1.52
  text "-" at 114.675,7.2 h1.52
  text "A2 / Blue" at 129.4,4.125 h1.52
  text "Battery IN" at 20.3,2.225 h1.52
  text "RoboteQ POWER" at 50.6,2.025 h1.52
  text "ACT 1 / POWER" at 108.85,1.725 h1.52
  text "ACT 2 / POWER" at 142.6,1.725 h1.52
  text "A1 / Blue" at 134.6,1.225 h1.52
Mechanical 1:
  lines w0.25: -0.05,103.525 152.325,103.525 152.325,0.025 0,0.025 0,103.475 -0.05,103.525

## Text inside footprints (layer, text, board x,y; h text height)
J1: Top Overlay "9" at 139.807,74.633 h1.5 r180; Top Overlay "15" at 123.812,74.633 h1.5 r180; Top Overlay "8" at 121.345,84.133 h1.5 r180; Top Overlay "1" at 140.942,84.133 h1.5 r180
J2: Top Overlay "9" at 139.045,53.551 h1.5 r180; Top Overlay "15" at 123.05,53.551 h1.5 r180; Top Overlay "8" at 120.583,63.051 h1.5 r180; Top Overlay "1" at 140.18,63.051 h1.5 r180
J3: Top Overlay "9" at 139.172,32.088 h1.5 r180; Top Overlay "15" at 123.177,32.088 h1.5 r180; Top Overlay "8" at 120.71,41.588 h1.5 r180; Top Overlay "1" at 140.307,41.588 h1.5 r180
J4: Top Overlay "6" at 96.005,12.95 h1.5 r180; Top Overlay "9" at 87.695,12.95 h1.5 r180; Top Overlay "5" at 86.31,22.35 h1.5 r180; Top Overlay "1" at 97.14,22.35 h1.5 r180